# Altium PCB PCB_FC_small.PcbDoc
Units mm, origin at the board's own origin, x right, y up, seen from the top; angles counter-clockwise.
Board outline 63.63 x 71.73 mm, 2 copper layers (Top Layer, Bottom Layer); 12 components, 19 nets, 70 pads, 0 vias.
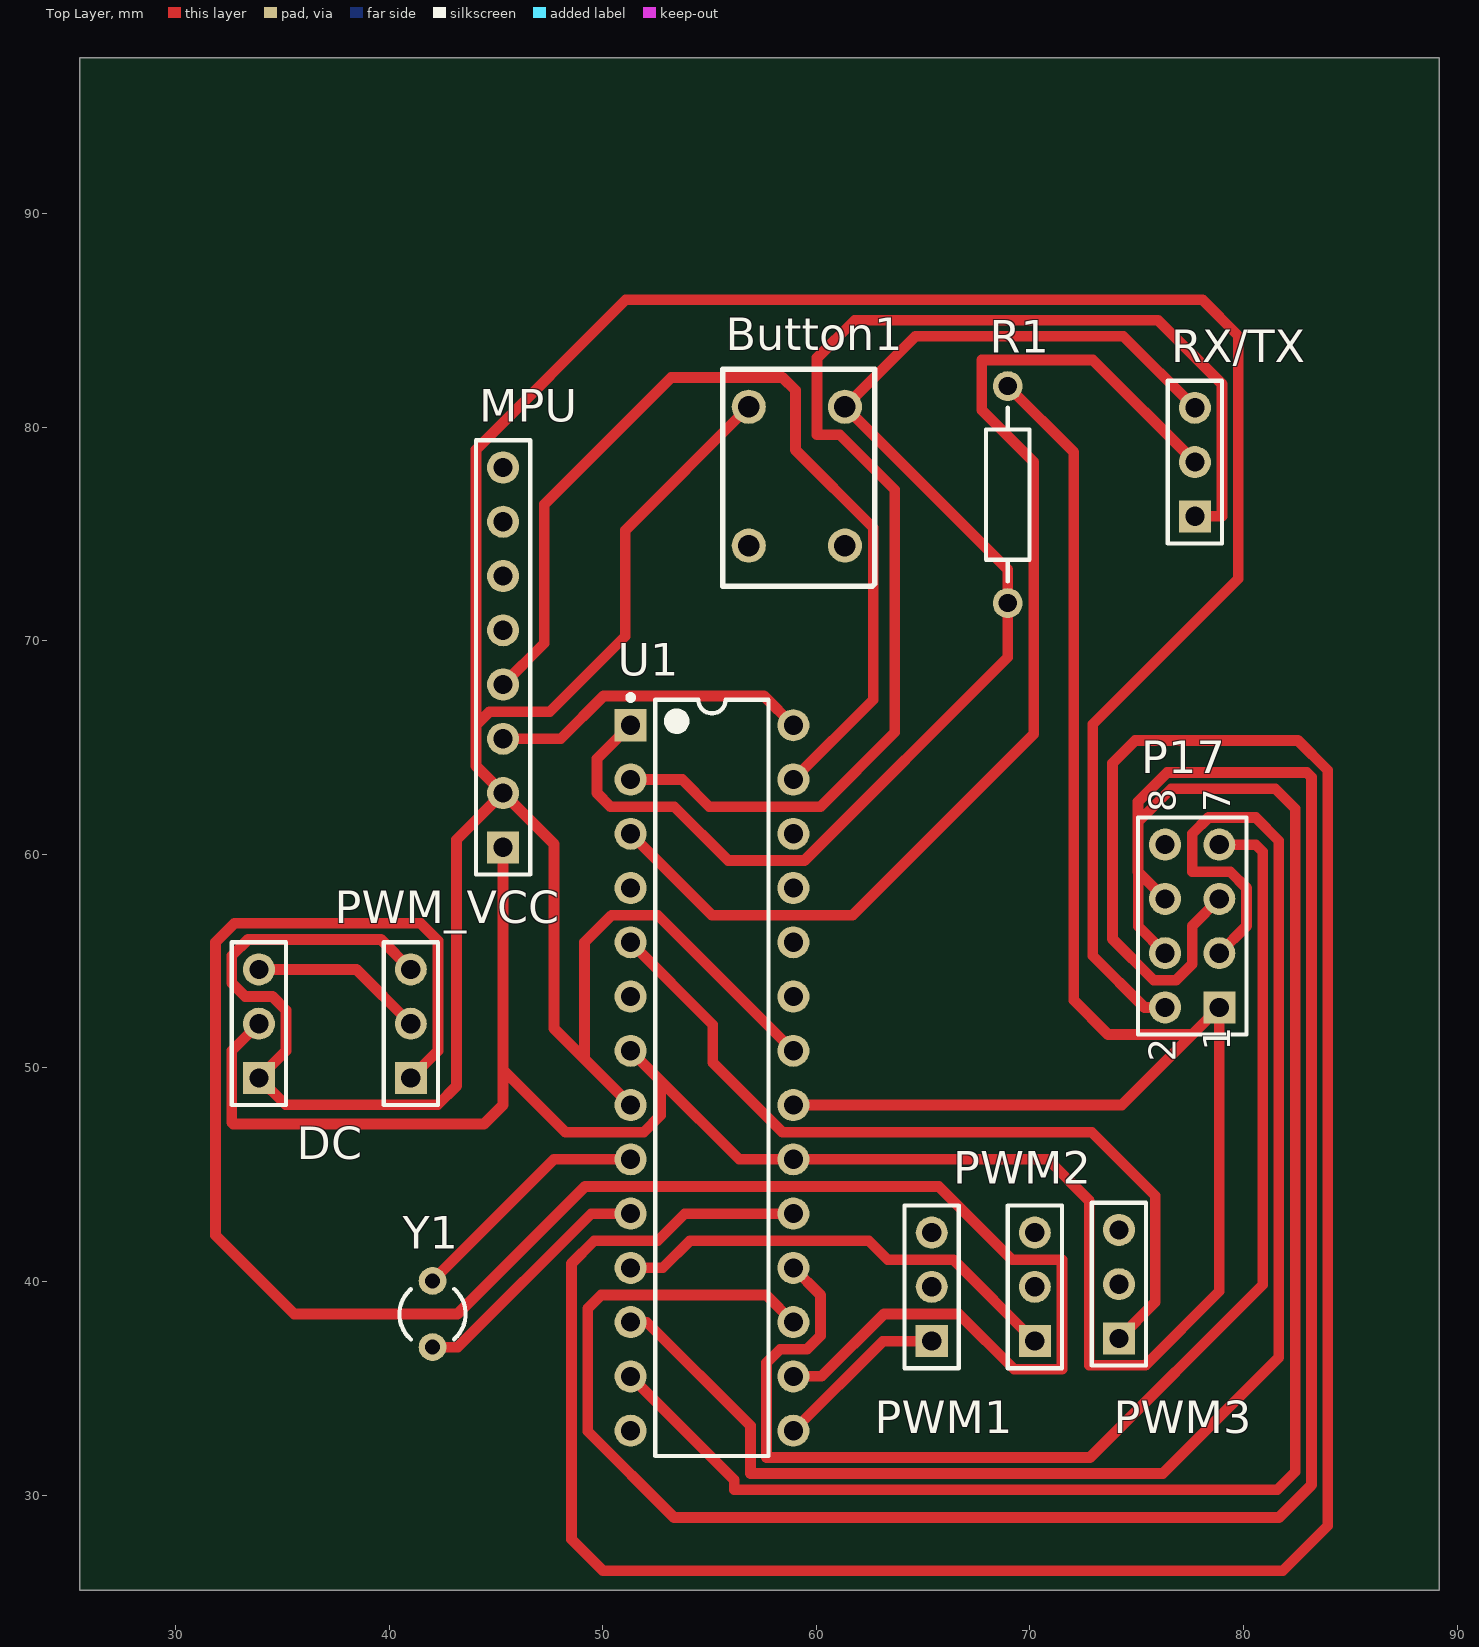
[diagram p0: Top Layer view]
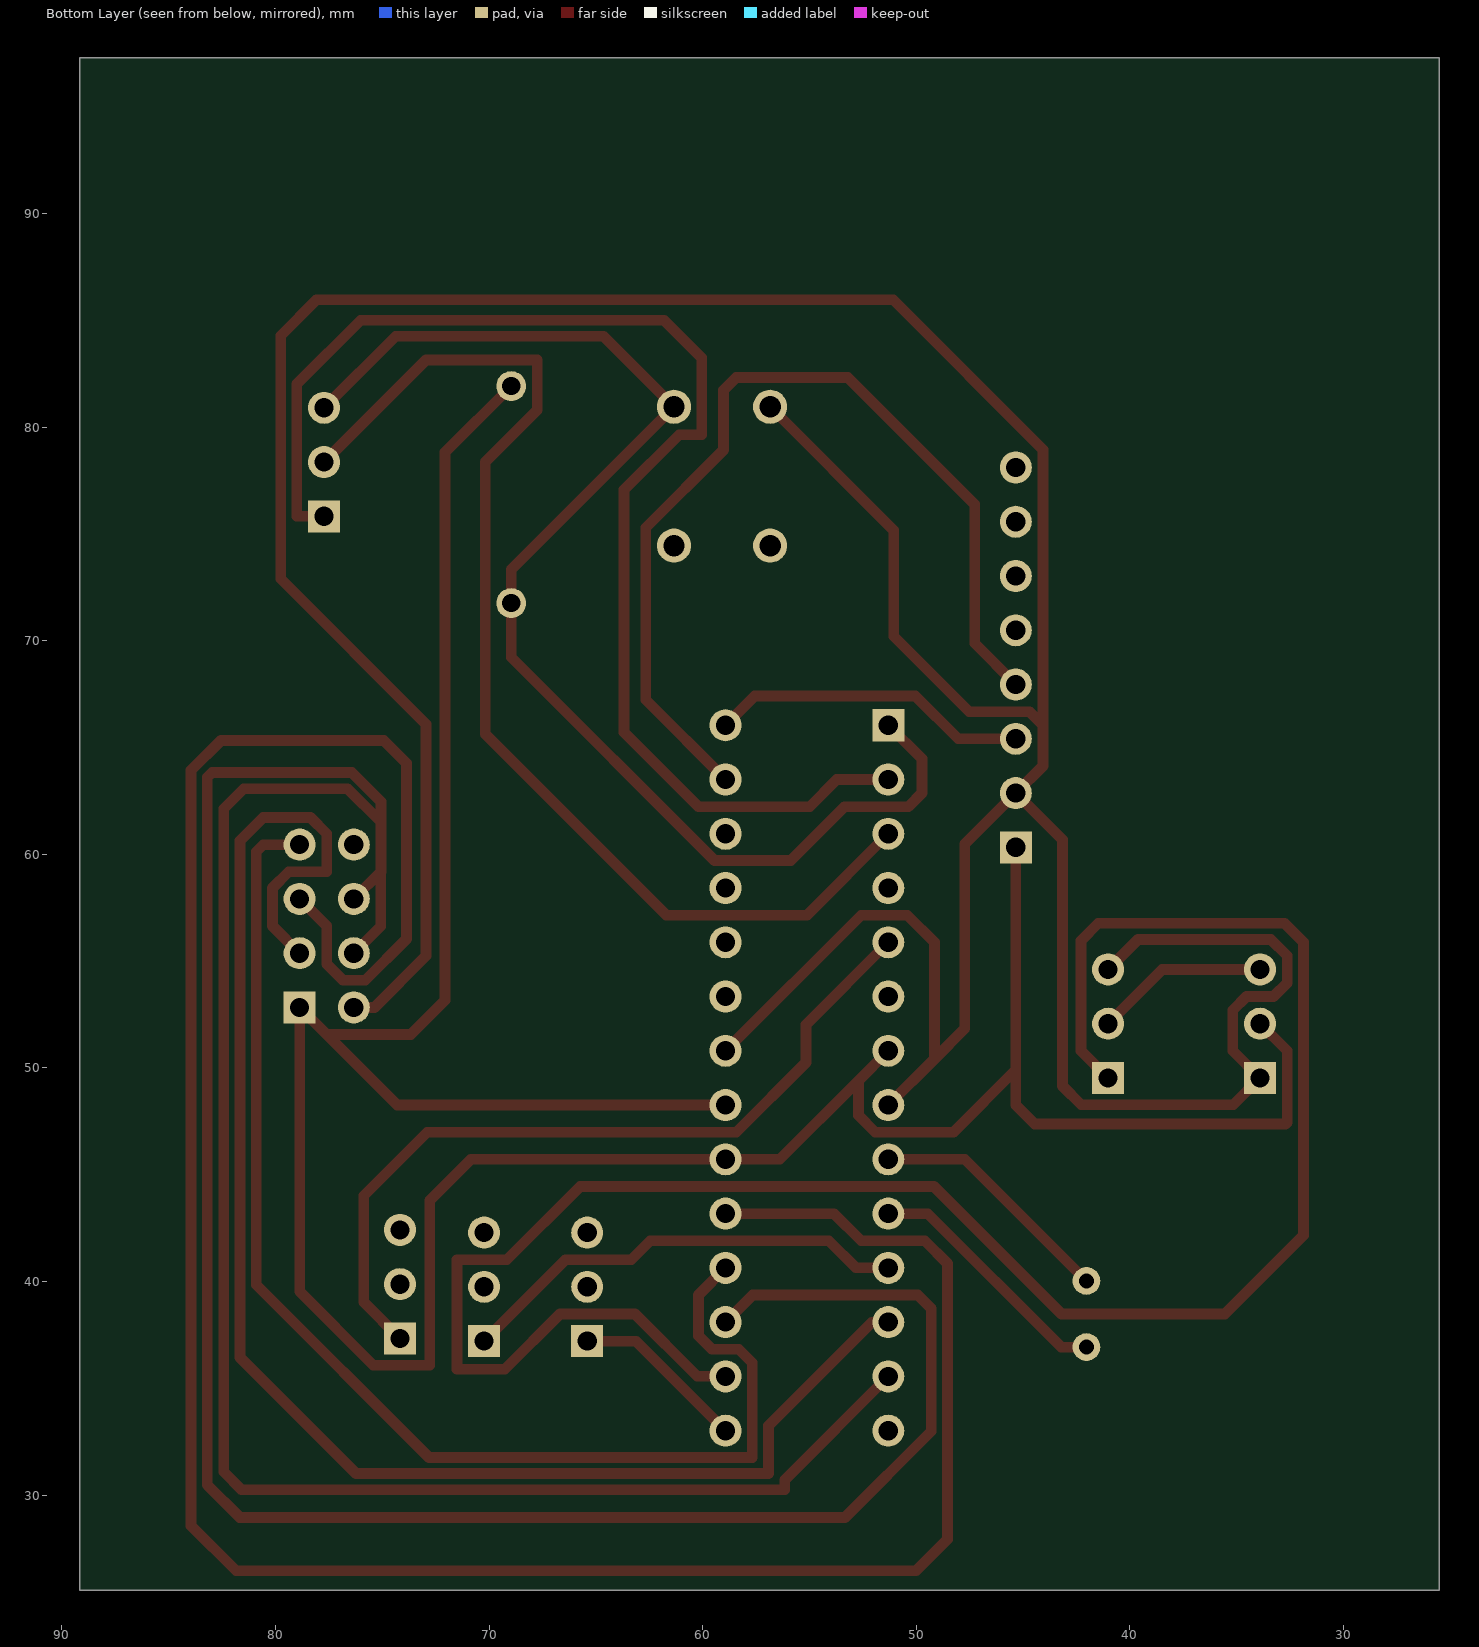
[diagram p1: Bottom Layer view, seen from below]

## Layer stack, top to bottom
Top Layer: signal copper 0.0356
Dielectric: dielectric 0.32, FR-4, Dk 4.8
Bottom Layer: signal copper 0.0356

## Board outline
25.527,25.553 25.527,97.282 89.154,97.282 89.154,25.553

## Design rules (kind name [scope] priority, off if disabled: settings)
Clearance [All] p1: gap=0.254
PolygonConnect [All] p1: connectstyle=Relief reliefconductorwidth=0.254 reliefentries=4 polygonreliefangle="90 Angle"
RoomDefinition FC_small [InComponentClass('FC_small')] p1: confinementstyle=ConfineIn formatcopy=TRUE lockcomponents=FALSE outline 25.908,97.79 89.535,97.79 89.535,26.061 25.908,26.061
RoutingLayers [All] p1: top layer_v5=TRUE bottom layer_v5=FALSE
RoutingVias [All] p1: holewidth=0.711 width=1.27 viastyle="Through Hole" minholewidth=0.711 minwidth=1.27 maxholewidth=0.711 maxwidth=1.27
SilkscreenOverComponentPads [All] p1: minsilkscreentomaskgap=0.254
SolderMaskExpansion [All] p1: expansion=0.102
Width [All] p1: maxlimit=0.5 minlimit=0.4 preferedwidth=0.5
26 further rules are at their usual default settings.

## Components (designator, comment, footprint, x,y, rotation, side; value= is the part's Value field where it differs from the comment)
Button1 "Button" Button 61.341,74.448 r90 top
DC "Header 3" HDR1X3 33.909,49.53 r90 top
MPU "MPU-6050" HDR1X8 45.339,60.325 r90 top
P17 "nRF24L01Connector" HDR2X4 78.867,52.832 r90 top
PWM1 "Header 3" HDR1X3 65.405,37.211 r90 top
PWM2 "Header 3" HDR1X3 70.231,37.211 r90 top
PWM3 "Header 3" HDR1X3 74.168,37.338 r90 top
PWM_VCC "Header 3" HDR1X3 41.021,49.53 r90 top
R1 "Res2" AXIAL-0.4 68.961,76.835 r90 top
RX/TX "Programmer" HDR1X3 77.724,75.819 r90 top
U1 "ATmega328-PU" 28P3 55.118,49.53 r0 top
Y1 "XTAL" R38 42.037,38.481 r0 top

## Footprints (in the part's own frame and the unit in brackets; to place one, negate y for a bottom-side part, rotate by r counter-clockwise, add the part's x,y. Pads: shape width x height; smd on the part's side, far side on the other; paste and mask are expansions set on the pad)
28P3 [mm] "DIP, 28-Leads, Row Spacing 7.62mm, Pitch 2.54mm, Body 34.67x7.3mm"
  rect 1.5x1.5 hole 0.9: 1(-3.81,16.51)
  round 1.5 hole 0.9: 2(-3.81,13.97) 3(-3.81,11.43) 4(-3.81,8.89) 5(-3.81,6.35) 6(-3.81,3.81) 7(-3.81,1.27) 8(-3.81,-1.27) 9(-3.81,-3.81) 10(-3.81,-6.35) 11(-3.81,-8.89) 12(-3.81,-11.43) 13(-3.81,-13.97) 14(-3.81,-16.51) 15(3.81,-16.51) 16(3.81,-13.97) 17(3.81,-11.43) 18(3.81,-8.89) 19(3.81,-6.35) 20(3.81,-3.81) 21(3.81,-1.27) 22(3.81,1.27) 23(3.81,3.81) 24(3.81,6.35) 25(3.81,8.89) 26(3.81,11.43) 27(3.81,13.97) 28(3.81,16.51)
  silkscreen extent -3.93,-17.7 2.65,17.93, body extent -3.6,-17.65 3.6,17.65, height 4.58
AXIAL-0.4 [mm] "Axial Device, Thru-Hole; 2 Leads; 0.4 in Pin Spacing"
  round 1.4 hole 0.85: 1(-5.08,0) 2(5.08,0)
  silkscreen extent -4.06,-1.02 4.06,1.02
Button [mm]
  round 1.6 hole 1: 1(0,4.5) 2(0,0) 3(6.5,4.5) 4(6.5,0)
  silkscreen extent -1.91,-1.4 8.25,5.72
HDR1X3 [mm] "Connector; Header; 3 Position"
  rect 1.5x1.5 hole 0.9: 1(0,0)
  round 1.5 hole 0.9: 2(2.54,0) 3(5.08,0)
  silkscreen extent -1.27,-1.27 6.35,1.27
HDR1X8 [mm] "Connector; Header; 8 Position"
  rect 1.5x1.5 hole 0.9: 1(0,0)
  round 1.5 hole 0.9: 2(2.54,0) 3(5.08,0) 4(7.62,0) 5(10.16,0) 6(12.7,0) 7(15.24,0) 8(17.78,0)
  silkscreen extent -1.27,-1.27 19.05,1.27
HDR2X4 [mm] "Connector; Header; 4x2 Position"
  rect 1.5x1.5 hole 0.9: 1(0,0)
  round 1.5 hole 0.9: 2(0,2.54) 3(2.54,0) 4(2.54,2.54) 5(5.08,0) 6(5.08,2.54) 7(7.62,0) 8(7.62,2.54)
  silkscreen extent -1.27,-1.27 8.89,3.81
R38 [mm] "Crystal, Thru-Hole; 2 Leads; Body 3.1 x 8.2 mm (Dia.xH)"
  round 1.3 hole 0.7: 1(0,1.55) 2(0,-1.55)
  silkscreen extent -1.55,-1.19 1.55,1.17

## Part data
DC PWM1 PWM2 PWM3 PWM_VCC: "Header, 3-Pin"
MPU: library part "Header 8", "Header, 8-Pin"
R1: "Resistor"
RX/TX: library part "Header 3", "Header, 3-Pin"
U1: "8-bit AVR Microcontroller, 32KB Flash, 1KB EEPROM, 2KB SRAM, 28-pin PDIP, Industrial Grade (-40°C to 85°C)"
Y1: "Crystal Oscillator"

## Nets (pads, with @x,y where several pads share a name; then routed paths per layer and width w, separated by ;. In a path a pad name is that pad's centre, name@x,y a point inside that pad or via, vN(x,y) a via of type N, cw(c..) or ccw(c..) an arc to the next point about the centre after c; other vN are vias at no path point)
GND: Button1.3 DC.1 MPU.2 P17.2 PWM_VCC.3 U1.8 U1.22 | length 191.5
  Top Layer w0.5: PWM_VCC.3 39.624,56.007 33.401,56.007 32.639,55.245 32.639,53.975 33.274,53.34 34.544,53.34 35.179,52.705 35.179,50.8 DC.1 35.163,48.276 42.275,48.276 43.155,49.156 43.155,60.681 MPU.2 ; U1.8 49.149,50.419 ; Button1.3 51.054,75.161 51.054,70.206 47.523,66.675 44.704,66.675 44.069,66.04 ; U1.22 52.578,57.15 50.419,57.15 49.149,55.88 49.149,50.419 ; P17.2 75.361,52.832 72.946,55.248 72.946,66.088 79.756,72.898 79.756,84.277 78.08,85.954 51.079,85.954 44.069,78.943 44.069,66.04 ; 44.069,66.04 44.069,64.135 MPU.2 ; MPU.2 47.727,60.477 47.727,51.841 49.149,50.419
NetButton1_4: Button1.4 R1.1 RX/TX.3 U1.1 | length 62.3
  Top Layer w0.5: U1.1 49.733,64.465 49.733,62.865 50.368,62.23 53.356,62.23 55.88,59.706 59.447,59.706 68.961,69.22 R1.1 68.961,73.328 Button1.4 64.643,84.25 74.373,84.25 RX/TX.3
NetDC_3: DC.3 PWM_VCC.2 | length 8.2
  Top Layer w0.5: DC.3 38.481,54.61 PWM_VCC.2
NetMPU_3: MPU.3 U1.28 | length 15
  Top Layer w0.5: MPU.3 48.036,65.405 50.043,67.412 57.556,67.412 U1.28
NetMPU_4: MPU.4 U1.27 | length 45
  Top Layer w0.5: MPU.4 47.269,69.875 47.269,76.378 53.213,82.321 58.42,82.321 59.027,81.715 59.027,78.927 62.662,75.291 62.662,67.234 U1.27
NetP17_3: P17.3 U1.12 | length 74.1
  Top Layer w0.5: U1.12 52.07,38.1 56.92,33.25 56.92,31.012 76.224,31.012 81.653,36.441 81.653,60.638 80.569,61.722 78.359,61.722 77.597,60.96 77.597,59.182 79.375,59.182 80.137,58.42 80.137,56.642 P17.3
NetP17_4: P17.4 U1.13 | length 80
  Top Layer w0.5: U1.13 56.159,30.709 56.159,30.251 81.585,30.251 82.423,31.09 82.423,62.128 81.483,63.068 76.621,63.068 75.072,61.519 75.072,56.627 P17.4
NetP17_5: P17.5 U1.19 | length 124.3
  Top Layer w0.5: U1.19 53.848,43.18 52.578,41.91 49.606,41.91 48.539,40.843 48.539,27.94 50.013,26.467 81.839,26.467 83.947,28.575 83.947,63.932 82.55,65.329 74.93,65.329 73.863,64.262 73.863,56.032 75.794,54.102 76.835,54.102 77.597,54.864 77.597,56.642 P17.5
NetP17_6: P17.6 U1.17 | length 99.3
  Top Layer w0.5: U1.17 57.658,39.37 49.936,39.37 49.301,38.735 49.301,32.995 53.34,28.956 81.661,28.956 83.185,30.48 83.185,63.602 82.956,63.83 76.429,63.83 75.057,62.459 75.057,59.182 P17.6
NetP17_7: P17.7 U1.18 | length 60.2
  Top Layer w0.5: U1.18 60.198,39.37 60.198,37.465 59.563,36.83 58.309,36.83 57.674,36.195 57.674,31.766 72.812,31.766 80.899,39.853 80.899,60.122 80.569,60.452 P17.7
NetPWM1_1: PWM1.1 U1.15 | length 8.2
  Top Layer w0.5: U1.15 63.119,37.211 PWM1.1
NetPWM2_1: PWM2.1 U1.11 | length 21.4
  Top Layer w0.5: U1.11 52.82,40.64 54.09,41.91 62.459,41.91 63.348,41.021 66.421,41.021 PWM2.1
NetPWM3_1: PWM3.1 U1.5 | length 37.9
  Top Layer w0.5: U1.5 55.161,52.027 55.161,50.249 58.42,46.99 72.898,46.99 75.87,44.018 75.87,39.04 PWM3.1
NetPWM_VCC_1: PWM_VCC.1 U1.16 | length 96.8
  Top Layer w0.5: PWM_VCC.1 42.291,50.8 42.291,55.956 41.478,56.769 32.766,56.769 31.877,55.88 31.877,42.164 35.56,38.481 43.205,38.481 49.174,44.45 65.735,44.45 69.164,41.021 71.501,41.021 71.501,35.89 69.266,35.89 66.675,38.481 63.17,38.481 60.249,35.56 U1.16
NetRX/TX_1: RX/TX.1 U1.2 | length 62.4
  Top Layer w0.5: U1.2 53.721,63.5 54.991,62.23 60.198,62.23 63.678,65.71 63.678,77.064 61.097,79.644 60.037,79.644 60.037,83.236 61.805,85.004 76,85.004 78.994,82.01 78.994,75.819 RX/TX.1
NetRX/TX_2: RX/TX.2 U1.3 | length 54.4
  Top Layer w0.5: U1.3 55.118,57.15 61.697,57.15 70.18,65.634 70.18,78.359 67.742,80.797 67.742,83.134 72.949,83.134 RX/TX.2
NetU1_9: U1.9 Y1.1 | length 11.6
  Top Layer w0.5: Y1.1 47.726,45.72 U1.9
NetU1_10: U1.10 Y1.2 | length 11.9
  Top Layer w0.5: Y1.2 43.215,36.931 49.464,43.18 U1.10
VCC: DC.2 MPU.1 P17.1 R1.2 U1.7 U1.20 U1.21 | length 151.8
  Top Layer w0.5: DC.2 32.639,50.8 32.639,47.447 32.715,47.371 44.45,47.371 45.339,48.26 45.339,49.911 ; MPU.1 45.339,49.911 ; U1.7 52.705,49.403 ; U1.21 74.295,48.26 77.597,51.562 ; R1.2 72.06,78.816 72.06,53.162 73.66,51.562 77.597,51.562 ; 45.339,49.911 48.26,46.99 51.918,46.99 52.705,47.777 52.705,49.403 ; 52.705,49.403 56.388,45.72 U1.20 70.841,45.72 72.771,43.79 72.771,36.084 75.413,36.084 78.867,39.538 P17.1 77.597,51.562
pads on no net: Button1.1 Button1.2 MPU.5 MPU.6 MPU.7 MPU.8 P17.8 PWM1.2 PWM1.3 PWM2.2 PWM2.3 PWM3.2 PWM3.3 U1.4 U1.6 U1.14 U1.23 U1.24 U1.25 U1.26

## Text inside footprints (layer, text, board x,y; h text height)
P17: Top Overlay "2" at 76.835,50.292 h1.27 r90; Top Overlay "1" at 79.375,50.8 h1.27 r90; Top Overlay "7" at 79.375,61.976 h1.27 r90; Top Overlay "8" at 76.835,61.976 h1.27 r90